# Altium PCB STM32WLE5CBU6 dev board.PcbDoc (part 2 of 2)
Units mm, origin at the board's own origin, x right, y up, seen from the top; angles counter-clockwise.
Board outline 20 x 45 mm, 2 copper layers (Top Layer, Bottom Layer), stack 1.569 mm thick; 116 components, 89 nets, 404 pads, 3 vias.
Unrouted connection lines stored in the file: 306.
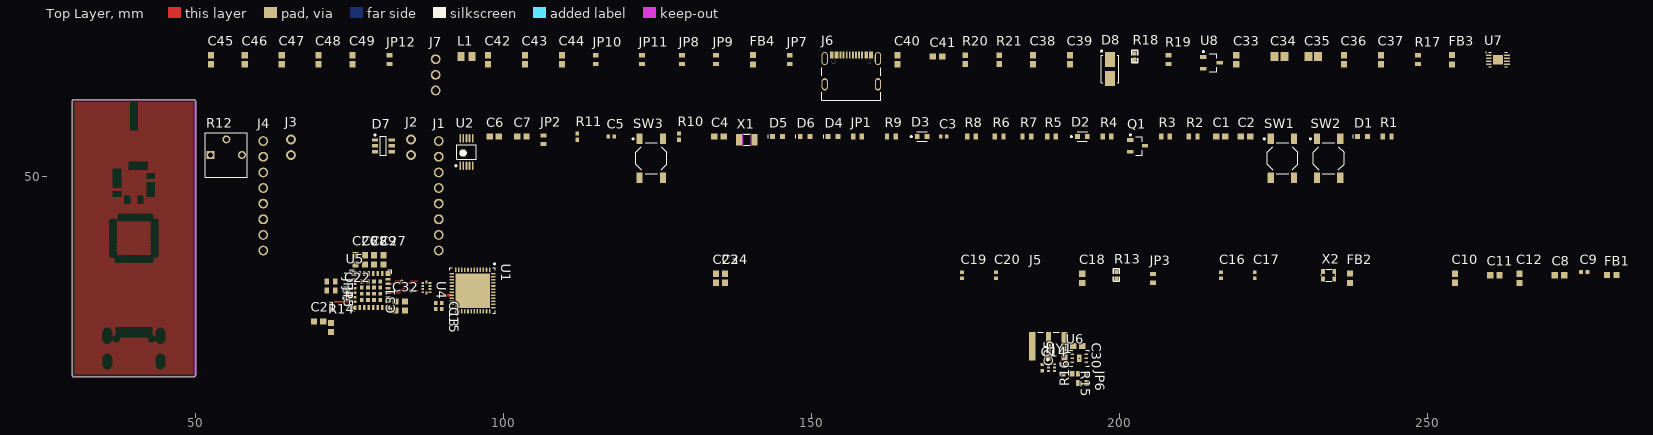
[diagram p0: Top Layer view]

## Part data (continued)
U7: library part CMP-00619-1, "LDO Regulator Pos 0.6V to 5V 1.5A 8-Pin U-DFN2030 T/R", Case/Package=TO-252-3, Dropout Voltage=190mV, Max Operating Temperature=85°C, Max Output current=1.5A, Max Output Voltage=5V, Max Supply Voltage=5.5V, Min Input Voltage=2.2V, Min Operating Temperature=-40°C, Min Output Voltage=600mV, Package Quantity=3000, Power Supply Rejection Ratio (PSRR)=61dB, Quiescent Current=1.2mA, Accuracy=1.5%, Mounting Technology="Surface Mount", Number of Outputs=1, Number of Regulators=1, Output Configuration=Positive, Output Current=1.5A, Output Type=Adjustable, Output Voltage=5V, Packaging="Tape and Reel", Pins=8, Polarity=Positive, Radiation Hardening=No, Reach SVHC Compliant=No, RoHS Compliant=Yes, Series=-, Weight=0.139332oz
U8: library part CMP-00487-2, "IC REG LINEAR 3.3V 200MA SOT23", Case/Package=SOT-23, Dropout Voltage=250mV, JLC_PN=C5446, Max Input Voltage=6V, Max Operating Temperature=85°C, Min Input Voltage=1.8V, Min Operating Temperature=-40°C, Nominal Output Voltage=3.3V, Output Current=200mA, ComponentLink1Description=Datasheet, ComponentLink1URL=https://datasheet.lcsc.com/lcsc/1809201513_Torex-Semicon-XC6206P332MR_C5446.pdf, Number of Pins=3, Output Type=Fixed, Packaging="Cut Tape", REACH SVHC="No SVHC", RoHS Compliant=Yes
X1: library part CMP-00624-1, "Crystal 0.032768MHz ±20ppm (Tol) 12.5pF FUND 70000Ohm 2-Pin CSMD T/R 32.768 kHz", Case/Package=SMD/SMT, ESR (Equivalent Series Resistance)=70kR, Frequency=32.768kHz, Frequency Tolerance=20ppm, JLC_PN=C32346, Load Capacitance=12.5pF, Max Operating Temperature=85°C, Min Operating Temperature=-40°C, Mounting Technology="Surface Mount", Packaging="Cut Tape", RoHS Compliant=Yes, Series=FC-135
X2: library part CMP-00610-2, "Xtal Osc Tcxo 32.0000MHZ Clpsw 10 pF 0.5 ppm", Current Rating="2 mA", Frequency="32 MHz", Frequency Stability="0.5 PPM", Load Capacitance="10 pF", Manufacturer=ECS, Maximum Operating Temperature="+ 85 C", Minimum Operating Temperature="- 30 C", Operating Supply Voltage="1.8 V, 2.5 V, 3.3 V", Package/Case="2 mm x 1.6 mm x 0.8 mm", Supply Voltage - Max="3.6 VDC", Supply Voltage - Min="1.7 VDC", Brand=ECS, Height="0.8 mm", Length="2 mm", Mounting Style=SMD/SMT, Output Format="Clipped Sine Wave", Product Category="TCXO Oscillators", Product Type=TCXO, Subcategory=Oscillators, Termination Style=SMD/SMT, Width="1.6 mm"

## Via types
v1: diameter 0.6, hole 0.3, Top Layer to Bottom Layer, tented both sides, 2 vias
v2: diameter 0.5, hole 0.2, Top Layer to Bottom Layer, 1 vias

## Nets (pads, with @x,y where several pads share a name; then routed paths per layer and width w, separated by ;. In a path a pad name is that pad's centre, name@x,y a point inside that pad or via, vN(x,y) a via of type N, cw(c..) or ccw(c..) an arc to the next point about the centre after c; other vN are vias at no path point)
3V3: C6.2 C7.2 C30.2 C31.2 C32.2 C37.2 JP4.1 JP5.1 JP6.2 Q1.2 R1.2 R3.1 R5.2 R6.2 R7.2 R9.2 R12.1 SW2.3 SW2.4 U2.7 U2.10 U5.16 U5.17 U6.4 U8.2
5V: C35.2 C36.2 D8.2 R2.2 U7.2 U7.3 U7.4 U8.3
ACTIVE: JP4.2 U5.3
ADJ_PA: R12.2 U1.35
BOOT0: C2.2 D7.6 J3.1 R4.2 SW2.1 SW2.2 U1.19
D_M: D7.3 J6.7A J6.7B R11.1
D_P: D7.1 J6.6A J6.6B R10.1
GND: C1.2 C2.1 C3.1 C4.2 C5.1 C6.1 C7.1 C8.1 C9.1 C10.2 C11.1 C12.1 C19.1 C20.1 C21.1 C22.1 C23.1 C24.1 C26.2 C27.2 C28.2 C29.2 C30.1 C31.1 C32.1 C34.1 C35.1 C36.1 C37.1 C38.1 C39.1 C40.1 C41.1 C42.1 C43.1 C44.1 C45.1 C46.1 C47.1 C48.1 C49.1 D7.2 HY1.2 HY1.4 HY1.5 J5.2 J5.3 J6.1A J6.1B J6.12A J6.12B J7.3 JP8.1 JP9.1 R4.1 R12.3 R16.1 R18.1 R19.2 R20.1 R21.2 SW1.1 SW1.2 SW3.1 SW3.2 U1.48 U1.49 U2.3 U4.2 U4.5 U4.7 U4.9 U4.10 U5.1 U5.6 U5.8 U5.9 U5.11 U5.12 U5.14 U5.15 U5.19 U5.21 U5.22 U5.27 U5.28 U5.29 U6.1 U6.7 U7.1 U7.9 U8.1 X2.1 X2.2
  other v2: 193.5,20.5
LNA_BYPASS: JP5.2 U5.4
NetC3_2: C3.2 JP1.2 X1.2
NetC4_1: C4.1 SW3.3 SW3.4 U1.42
NetC5_2: C5.2 JP2.2 X1.1
NetC8_2: C8.2 C9.2 FB1.1 U1.24
NetC10_1: C10.1 FB2.1 X2.4
NetC11_2: C11.2 C18.1 X2.3
NetC12_2: C12.2 JP3.2
NetC13_1: C13.1 C15.1 FB1.2 U4.1
NetC13_2: C13.2 U1.22
NetC14_1: C14.1 HY1.3 J5.1
NetC14_2: C14.2 C17.1 C20.2 HY1.1
NetC15_2: C15.2 U1.23
NetC16_1: C16.1 C17.2 C19.2
NetC16_2: C16.2 U5.7 | length 4.1
  Top Layer w0.254: 71.688,29.688 U5.7
NetC18_2: C18.2 R13.2
NetC21_2: C21.2 R14.2 U5.2
NetC25_1: C25.1 HY1.6
NetC25_2: C25.2 R15.1 U6.3
NetC33_1: C33.1 R18.2
NetC34_2: C34.2 FB3.1 R17.2 U7.5 U7.6 U7.7
NetC42_2: C42.2 C43.2 C44.2 FB4.1 U1.41
NetD1_1: D1.1 R1.1
NetD2_1: D2.1 R3.2
NetD2_2: D2.2 U1.2
NetD3_1: D3.1 R5.1
NetD3_2: D3.2 U1.3
NetD4_1: D4.1 R9.1
NetD4_2: D4.2 U1.6
NetD5_1: D5.1 R6.1
NetD6_1: D6.1 R7.1
NetFB2_2: FB2.2 U1.30
NetJ1_1: J1.1 U1.7
NetJ1_2: J1.2 U1.8
NetJ1_3: J1.3 U1.9
NetJ1_4: J1.4 U1.10
NetJ1_5: J1.5 U1.12
NetJ1_6: J1.6 U1.13
NetJ1_7: J1.7 U1.14
NetJ1_8: J1.8 U1.15
NetJ2_2: J2.2 U2.4
NetJ3_2: J3.2 U2.6
NetJ4_1: J4.1 U1.36
NetJ4_3: J4.3 U1.34
NetJ4_5: J4.5 U1.32
NetJ4_6: J4.6 U1.31
NetJ4_7: J4.7 U1.17
NetJ4_8: J4.8 U1.16
NetJ6_0: J6.0 JP8.2 JP9.2
NetJ6_5A: J6.5A R20.2
NetJ6_5B: J6.5B R21.1
NetJ7_1: J7.1 JP11.1
NetJ7_2: J7.2 JP12.1
NetJP1_1: JP1.1 U1.40
NetJP2_1: JP2.1 U1.39
NetJP3_1: JP3.1 U1.27
NetJP7_1: JP7.1 JP10.2 JP11.2 L1.2
NetJP10_1: JP10.1 U1.47
NetQ1_3: Q1.3 R8.2
NetR8_1: R8.1 R10.2 U2.1
NetR11_2: R11.2 U2.2
NetR13_1: R13.1 U1.26
NetR17_1: R17.1 R19.1 U7.8
NetU4_6: U4.6 U5.18 | length 5.5
  Top Layer w0.254: U5.18 83.139,31.139 85,33 86,33
NetU4_8: U4.8 U5.20 | length 5.5
  Top Layer w0.254: U5.20 82.089,32.589 82.5,33 v1(83.5,33) ; v1(85,31.5) 86,31.5
  Bottom Layer w0.254: v1(83.5,33) v1(85,31.5)
NetU5_10: U5.10 U5.13
NRST: C1.1 D1.2 D7.4 J2.1 SW1.3 SW1.4 U1.18
R\E\N\U\M\: Q1.1 R2.1 U1.38
RF_DET_EN: JP6.1 R15.2 R16.2
RF_DET_OUT: U1.43 U6.6
RFI_N: U1.21 U4.3
RFI_P: U1.20 U4.4 | length 1.2
  Top Layer w0.381: 90.5,30.9 90.65,30.75 U1.20
TX/R\X\: R14.1 U1.1
USART1_RX: D5.2 U1.5 U2.9
USART1_TX: D6.2 U1.4 U2.8
VDD: C45.2 C46.2 C47.2 C48.2 FB4.2 U1.11 U1.37 U1.44
VDD_PA: C26.1 C27.1 C28.1 C29.1 C33.2 FB3.2 U5.23 U5.24 U5.25 U5.26
VDD_USB: D7.5 D8.1 J6.4A J6.4B J6.9A J6.9B
VDDRF: C23.2 C24.2 C40.2 C41.2 JP7.2 U1.28 U1.46
VDDRF1V55: C38.2 C39.2 C49.2 JP12.2 L1.1 U1.25 U1.29 U1.45
VPC: C22.2 U1.33 U5.5
pads on no net: J4.2 J4.4 J5.4 J5.5 J6.8A J6.8B U2.5 U6.2 U6.5

## Polygon pours and split planes (outlines as drawn)
GND on Top Layer "GND_L01_P000" (solid, pour order 0): 50,63 50,17 30,17 30,63

## Keep-outs
Keep-Out Layer:
  the board outline again, w0.254